# EAGLE board Xbee_Adapter (EAGLE 7.6.0)
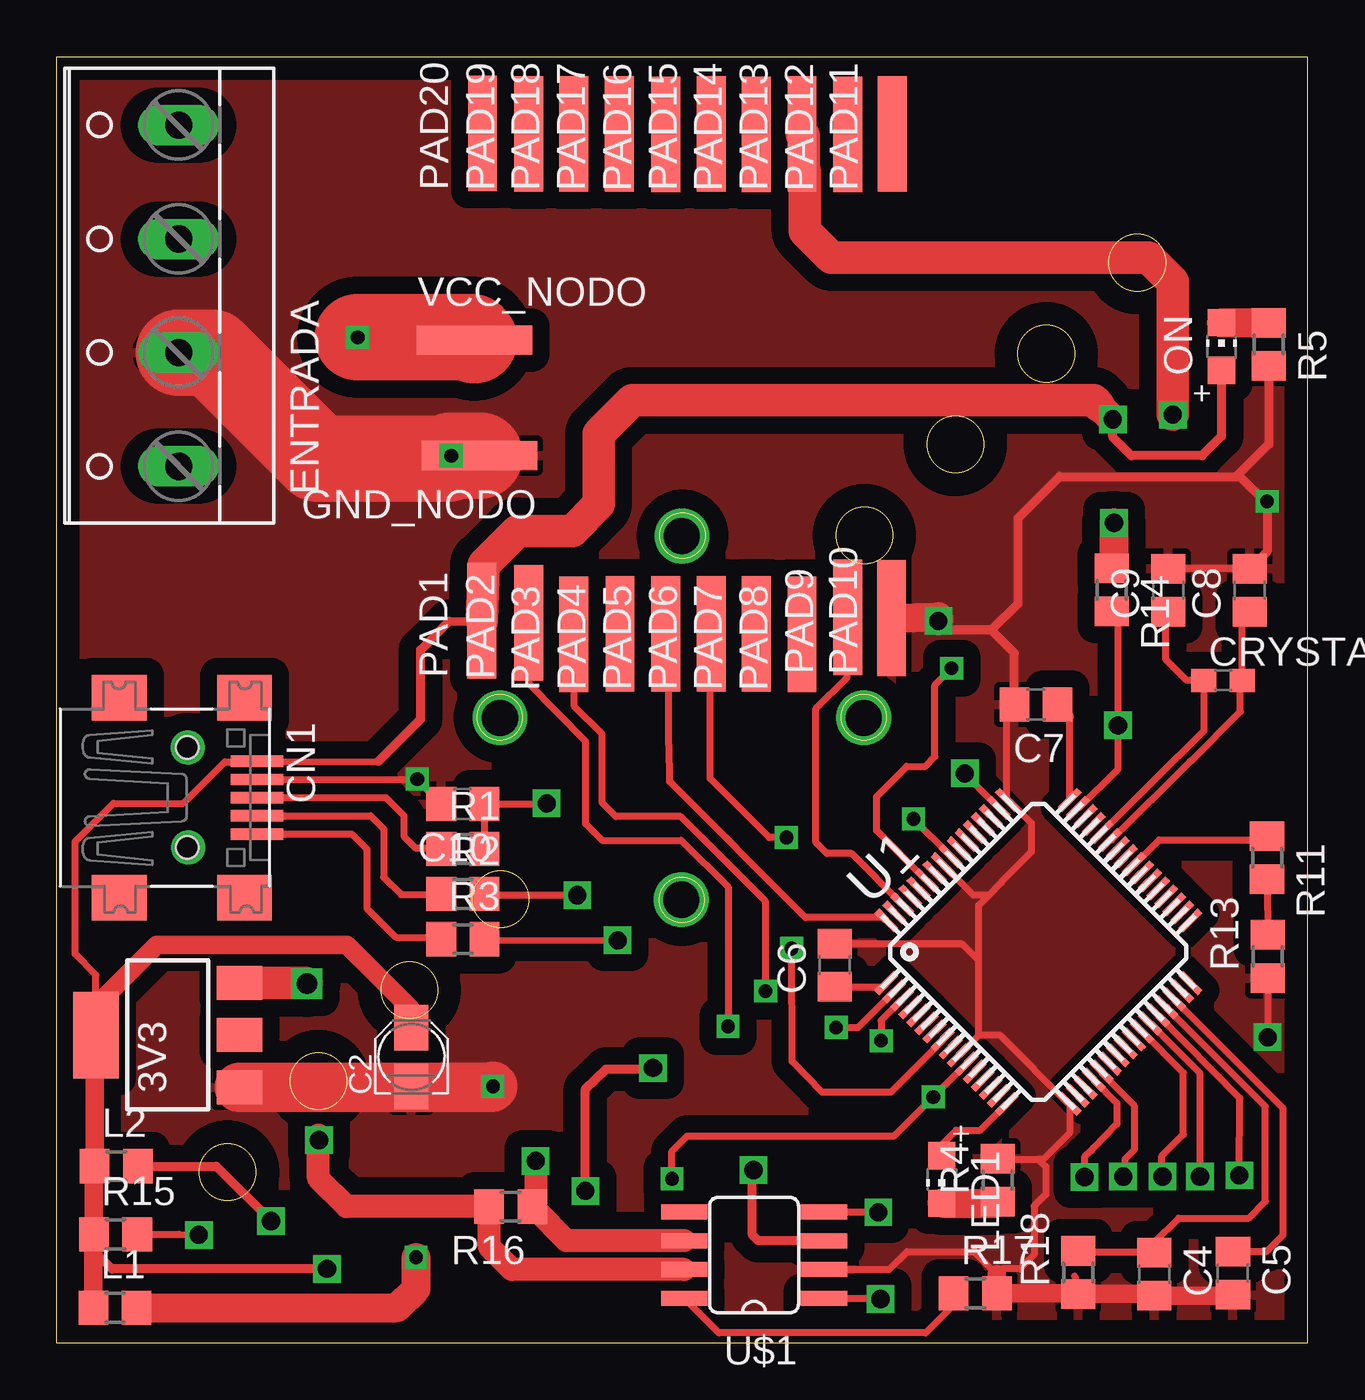
[diagram p0: board, top side]
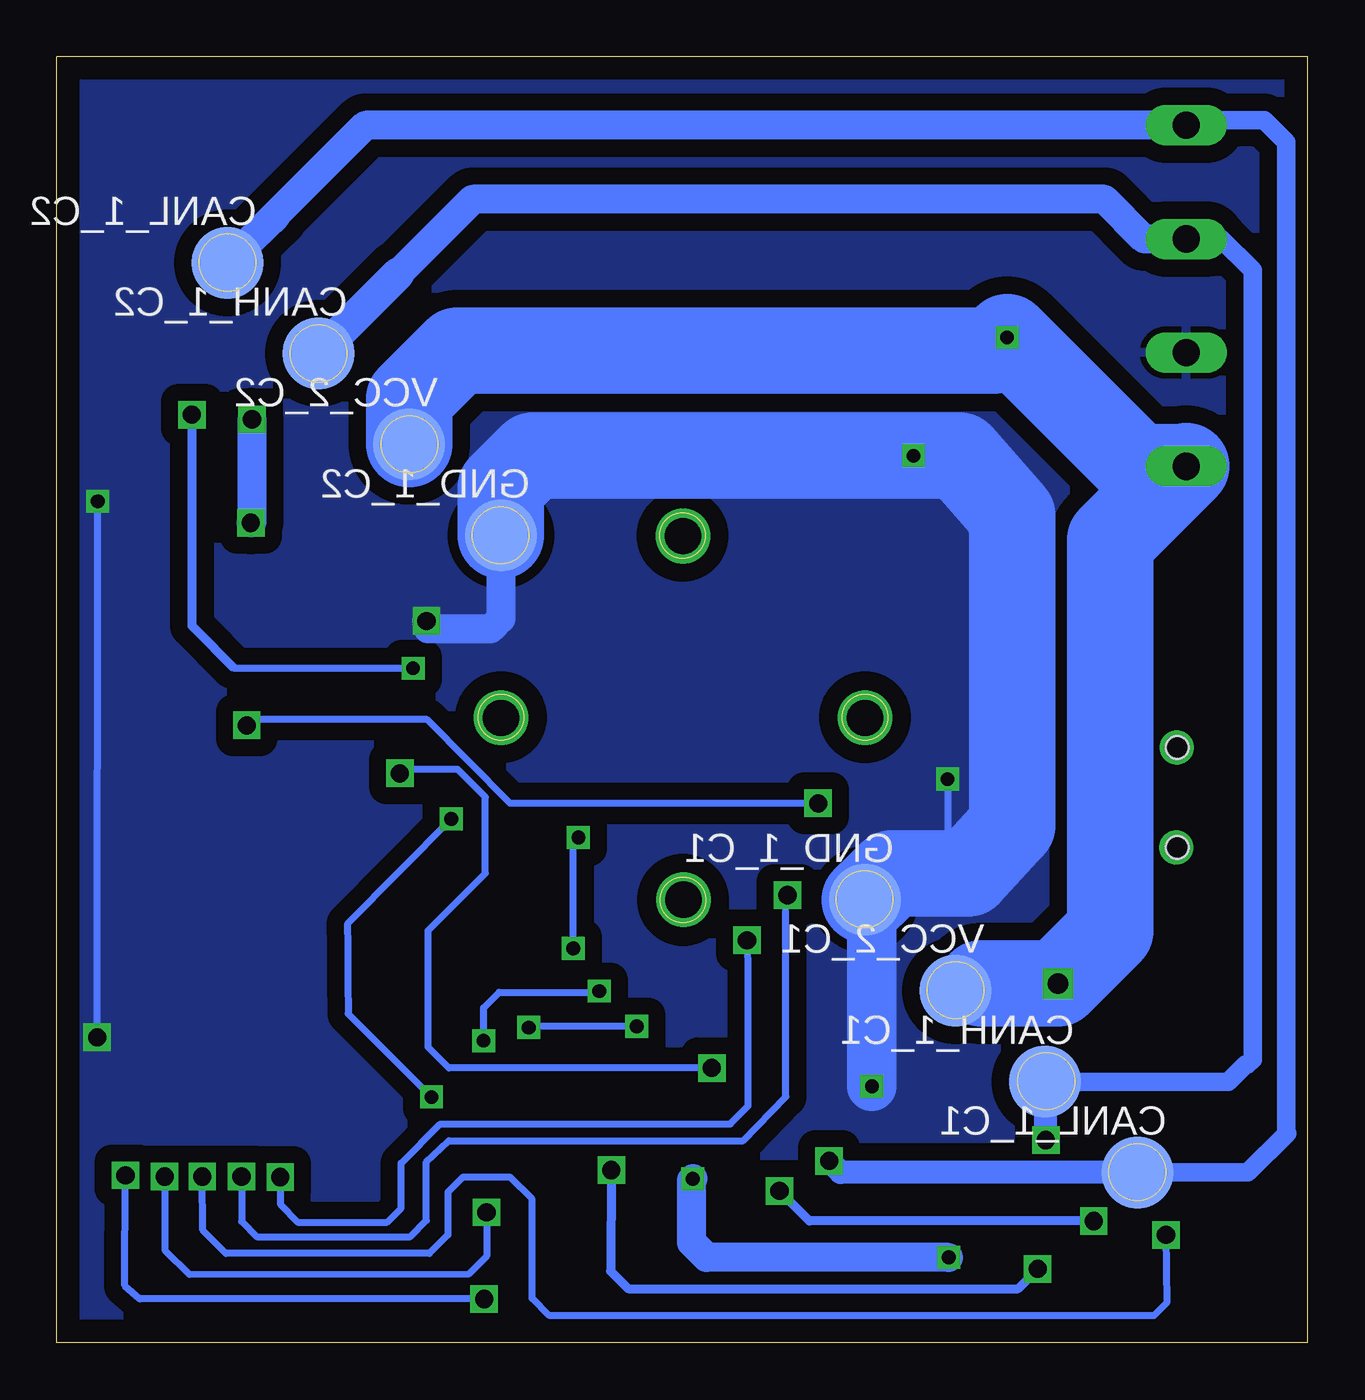
[diagram p1: board, bottom side, seen from below]

Size 55 x 56.55 mm. Coordinates in mm from the lower left corner, seen from the top.
Outline: 0,0 0,56.55 55,56.55 55,0 0,0
Outline: circle at 27.47,19.47 radius 1
Outline: circle at 19.47,27.5 radius 1
Outline: circle at 35.47,27.5 radius 1
Outline: circle at 43.5,43.5 radius 1.25
Outline: circle at 47.5,47.5 radius 1.25
Outline: circle at 43.5,43.5 radius 1.25
Outline: circle at 39.5,39.5 radius 1.25
Outline: circle at 35.5,35.5 radius 1.25
Outline: circle at 15.5,15.5 radius 1.25
Outline: circle at 11.5,11.5 radius 1.25
Outline: circle at 47.5,47.5 radius 1.25
Outline: circle at 39.5,39.5 radius 1.25
Outline: circle at 19.5,19.5 radius 1.25
Outline: circle at 7.5,7.5 radius 1.25
Outline: circle at 19.5,19.5 radius 1.25
Outline: circle at 15.5,15.5 radius 1.25
Outline: circle at 11.5,11.5 radius 1.25
Outline: circle at 35.5,35.5 radius 1.25
Outline: circle at 27.5,35.5 radius 1
Outline: circle at 7.5,7.5 radius 1.25
Copper layers (1*16): Top 0.035mm / dielectric 1.5mm / Bottom 0.035mm
Design rules "default": minimum track width 10mil, minimum drill 24mil, track to track 8mil, track to pad 8mil, pad to pad 8mil, via to via 8mil, smd to smd 8mil, copper to edge 40mil, drill to drill 8mil, minimum pad ring 10mil, minimum via ring 8mil, stop-mask expansion 4mil, vias tented up to drill 0mil, thermal gap 10mil

## Footprints (pad centres in the part's own frame; a part is rotated, then mirrored left to right if it is on the bottom)
SOT223 = smd 1.5 x 2: 1 -2.3,-3.15; 2 0,-3.15; 3 2.3,-3.15 | smd 3.8 x 2: 4 0,3.15
PANASONIC_A = smd 2 x 1.5: + 1.3,0; - -1.3,0
C0805 = smd 1.3 x 1.5: 1 -0.95,0; 2 0.95,0
B2,54 = smd 3.175 x 3.175 bottom: P$1 0,0 | smd 2.54 x 2.54 bottom: TP 0,0
USB-MINIB = smd 0.5 x 2.308: D+ 0,4.064; D- -0.8,4.064; GND 1.6,4.064; ID 0.8,4.064; VBUS -1.6,4.064 | smd 2 x 2.4: GND1 -4.4,-2; GND2 -4.4,3.5; GND3 4.4,3.5; GND4 4.4,-2 | hole 1: -2.2,1; 2.2,1
C0603 = smd 1.1 x 1: 1 -0.85,0; 2 0.85,0
W237-4 = drill 1.194 long: 1 -7.5,-1.27; 2 -2.5,-1.27; 3 2.5,-1.27; 4 7.5,-1.27
SMD2,54-5,08 = smd 1.27 x 5.08: 1 0,0
R0805 = smd 1.3 x 1.5: 1 -0.95,0; 2 0.95,0
CHIP-LED0805 = smd 1.2 x 1.2: A 0,-1.05; C 0,1.05
TQFP64-10X10 = smd 1.2 x 0.3: 1 -5.7,3.75; 2 -5.7,3.25; 3 -5.7,2.75; 4 -5.7,2.25; 5 -5.7,1.75; 6 -5.7,1.25; 7 -5.7,0.75; 8 -5.7,0.25; 9 -5.7,-0.25; 10 -5.7,-0.75; 11 -5.7,-1.25; 12 -5.7,-1.75; 13 -5.7,-2.25; 14 -5.7,-2.75; 15 -5.7,-3.25; 16 -5.7,-3.75; 33 5.7,-3.75; 34 5.7,-3.25; 35 5.7,-2.75; 36 5.7,-2.25; 37 5.7,-1.75; 38 5.7,-1.25; 39 5.7,-0.75; 40 5.7,-0.25; 41 5.7,0.25; 42 5.7,0.75; 43 5.7,1.25; 44 5.7,1.75; 45 5.7,2.25; 46 5.7,2.75; 47 5.7,3.25; 48 5.7,3.75 | smd 0.3 x 1.2: 17 -3.75,-5.7; 18 -3.25,-5.7; 19 -2.75,-5.7; 20 -2.25,-5.7; 21 -1.75,-5.7; 22 -1.25,-5.7; 23 -0.75,-5.7; 24 -0.25,-5.7; 25 0.25,-5.7; 26 0.75,-5.7; 27 1.25,-5.7; 28 1.75,-5.7; 29 2.25,-5.7; 30 2.75,-5.7; 31 3.25,-5.7; 32 3.75,-5.7; 49 3.75,5.7; 50 3.25,5.7; 51 2.75,5.7; 52 2.25,5.7; 53 1.75,5.7; 54 1.25,5.7; 55 0.75,5.7; 56 0.25,5.7; 57 -0.25,5.7; 58 -0.75,5.7; 59 -1.25,5.7; 60 -1.75,5.7; 61 -2.25,5.7; 62 -2.75,5.7; 63 -3.25,5.7; 64 -3.75,5.7
SO8 = smd 0.66 x 2.032: 1 -1.905,-3.073; 2 -0.635,-3.073; 3 0.635,-3.073; 4 1.905,-3.073; 5 1.905,3.073; 6 0.635,3.073; 7 -0.635,3.073; 8 -1.905,3.073

## Placement (x,y rotation side)
3V3  LD117AS33TR  [SOT223]  4.87,13.53 90 top
C2  [PANASONIC_A]  15.59,12.56 90 top
C4  2200pF  [C0805]  48.25,3.01 270 top
C5  10nF  [C0805]  51.71,3.07 270 top
C6  1u  [C0805]  34.21,16.6 90 top
C7  1u  [C0805]  43.04,28.06 180 top
C8  36pF  [C0805]  52.44,33.09 90 top
C9  18pF  [C0805]  48.86,33.09 90 top
C10  0.1u  [C0805]  17.85,23.69 180 top
CANH_1_C1  TPB2,54  [B2,54]  11.55,11.47 0 top
CANH_1_C2  TPB2,54  [B2,54]  43.5,43.5 0 top
CANL_1_C1  TPB2,54  [B2,54]  7.48,7.48 0 top
CANL_1_C2  TPB2,54  [B2,54]  47.49,47.49 0 top
CN1  [USB-MINIB]  4.74,23.97 270 top
CRYSTAL  32.768kHz  [C0603]  51.27,29.13 0 top
ENTRADA  [W237-4]  4.08,46.04 90 top
GND_1_C1  TPB2,54  [B2,54]  19.47,19.47 0 top
GND_1_C2  TPB2,54  [B2,54]  35.48,35.5 0 top
GND_NODO  [SMD2,54-5,08]  18.58,39.01 90 top
L1  330-600Ohm@1Mhz  [R0805]  2.56,1.54 0 top
L2  330-600Ohm@1Mhz  [R0805]  2.61,7.76 0 top
LED1  [CHIP-LED0805]  38.9,7.18 180 top
ON  [CHIP-LED0805]  51.2,43.81 0 top
PAD1  [SMD2,54-5,08]  18.69,31.74 0 top
PAD2  [SMD2,54-5,08]  20.74,31.67 0 top
PAD3  [SMD2,54-5,08]  22.72,31.16 0 top
PAD4  [SMD2,54-5,08]  24.76,31.18 0 top
PAD5  [SMD2,54-5,08]  26.76,31.18 0 top
PAD6  [SMD2,54-5,08]  28.77,31.18 0 top
PAD7  [SMD2,54-5,08]  30.75,31.18 0 top
PAD8  [SMD2,54-5,08]  32.76,31.16 0 top
PAD9  [SMD2,54-5,08]  34.76,31.89 0 top
PAD10  [SMD2,54-5,08]  36.69,31.87 0 top
PAD11  [SMD2,54-5,08]  36.72,53.15 0 top
PAD12  [SMD2,54-5,08]  34.76,53.13 0 top
PAD13  [SMD2,54-5,08]  32.76,53.15 0 top
PAD14  [SMD2,54-5,08]  30.75,53.13 0 top
PAD15  [SMD2,54-5,08]  28.77,53.15 0 top
PAD16  [SMD2,54-5,08]  26.76,53.13 0 top
PAD17  [SMD2,54-5,08]  24.73,53.15 0 top
PAD18  [SMD2,54-5,08]  22.72,53.15 0 top
PAD19  [SMD2,54-5,08]  20.74,53.15 0 top
PAD20  [SMD2,54-5,08]  18.71,53.18 0 top
R1  0  [R0805]  17.85,21.71 0 top
R2  0  [R0805]  17.85,19.73 0 top
R3  0  [R0805]  17.85,17.75 0 top
R4  [R0805]  41.37,7.15 90 top
R5  1K  [R0805]  53.28,43.91 270 top
R11  0  [R0805]  53.2,21.33 270 top
R13  0  [R0805]  53.23,16.98 90 top
R14  4.7k  [R0805]  46.37,33.11 270 top
R15  0  [R0805]  2.58,4.77 0 top
R16  120  [R0805]  19.96,5.99 180 top
R17  10k  [R0805]  40.38,2.18 0 top
R18  0  [R0805]  44.9,3.09 90 top
U1  CY8C4247AZI-M485  [TQFP64-10X10]  43.15,17.19 45 top
U$1  SN65HVD230/1  [SO8]  30.65,3.85 90 top
VCC_2_C1  TPB2,54  [B2,54]  15.49,15.49 0 top
VCC_2_C2  TPB2,54  [B2,54]  39.51,39.51 0 top
VCC_NODO  [SMD2,54-5,08]  18.36,44.09 270 top

## Library data of the parts
3V3 = v-reg
C2 C4-C10 CRYSTAL L1 L2 R1-R5 R11 R13-R18 = rcl
CANH_1_C1 CANH_1_C2 CANL_1_C1 CANL_1_C2 GND_1_C1 GND_1_C2 VCC_2_C1 VCC_2_C2 = testpad
CN1 LED1 ON = adafruit
ENTRADA = con-wago-500; OC_FARNELL: unknown; OC_NEWARK: unknown
GND_NODO PAD1-PAD20 VCC_NODO = wirepad
U1 = CypressPSoC
U$1 = texas_instruments

## Nets
3V3: 3V3.4 C2.+ CN1.VBUS L1.1 L2.1 ON.A PAD1.1 R14.1 R15.1 U$1.3
CAN_RX: U1.27 U$1.4
CAN_TX: U1.28 U$1.1
CANH: CANH_1_C1.TP CANH_1_C2.TP ENTRADA.3 R16.2 U$1.7
CANL: CANL_1_C1.TP CANL_1_C2.TP ENTRADA.4 R16.1 U$1.6
CMOD: C4.1 R18.2 U1.29
CTANK: C5.1 U1.30
GND: 3V3.1 C2.- C4.2 C5.2 C6.2 C7.2 C8.2 C9.2 C10.2 CN1.D- ENTRADA.2 GND_1_C1.TP GND_1_C2.TP GND_NODO.1 PAD10.1 R4.2 R5.2 R13.1 R17.2 R18.1 U1.10 U1.17 U1.49 U1.57 U$1.2
N$1: CN1.D+ R1.1
N$2: CN1.ID R2.1
N$3: CN1.GND R3.1
N$4: R11.2 R13.2
N$5: LED1.A U1.16
N$6: LED1.C R4.1
N$9: R17.1 U$1.8
N$10: ON.C R5.1
P0_1: R11.1 U1.40
P0_4: C8.1 CRYSTAL.2 U1.43
P0_5: C9.1 CRYSTAL.1 U1.44
RESET_XBEE: PAD5.1 U1.64
RX_STRENGTH: PAD6.1 U1.8
SAR_BY: C6.1 U1.1
SCL_S2: U1.51
SCL_S3: U1.12
SDA_S2: U1.52
SDA_S3: U1.13
SLEEP_CTRL: PAD9.1 U1.62
SLEEP_XBEE: PAD13.1 U1.59
SWDCLK: R2.2 U1.21
SWDIO: R3.2 U1.20
UART_RX: PAD3.1 U1.3
UART_TX: PAD2.1 U1.2
VCC_9-12V: 3V3.3 ENTRADA.1 VCC_2_C1.TP VCC_2_C2.TP VCC_NODO.1
VCCD: C7.1 U1.48
VDDA: L1.2 U1.11 U1.56
VDDD: L2.2 U1.50
VDDIO: R15.2 U1.26
XRES: C10.1 R1.2 R14.2 U1.47

## Tracks (layer width: path | path; a pad name or v marks a point on that pad's centre or on a via)
3V3  (via drill 0.8)
  Top 0.305: 3V3.4 1.72,14.8 1.72,16.17 0.8,17.09 0.8,22.04 2.48,23.72 5.55,23.72 7.38,25.54 8.78,25.54 CN1.VBUS 14.06,25.54 15.99,27.45
  Top 0.406: U$1.3 30.83,4.49 30.57,4.74 30.57,7.71 v30.62,7.59 | v11.88,3.24 2.42,3.24 1.61,4.06 | PAD1.1 17.24,31.72 15.99,30.47 15.99,27.45 15.99,27.42 14.14,25.57 | ON.A 51.2,39.87 50.33,39.01 47.24,39.01 46.42,39.82 v46.42,40.61
  Top 0.813: L1.1 1.61,4.06 1.61,4.74 R15.1 1.63,7.74 L2.1 1.66,13.47 3V3.4 | C2.+ 15.59,14.65 12.74,17.49 4.39,17.49 1.72,14.8
  Top 1.27: 45.81,41.22 v46.42,40.61 | v46.47,36.06 46.47,34.16 R14.1
  Top 1.422: PAD1.1 18.76,34.23 20.24,35.7 22.65,35.7 23.82,36.87 23.82,39.97 25.29,41.44 45.58,41.44 45.81,41.22
  Bottom 0.406: v30.62,7.59 30.65,3.14 29.89,2.38 12.74,2.38 v11.88,3.24
  Bottom 1.27: v46.42,40.61 46.42,36.11 v46.47,36.06
CAN_RX  (via drill 0.8)
  Top 0.305: U$1.4 36.09,5.76 v36.11,5.73 | v50.26,7.31 50.26,11.84 U1.27
  Bottom 0.305: v36.11,5.73 36.11,3.8 36.9,3.01 49.17,2.99 50.23,4.03 50.23,7.28 v50.26,7.31
CAN_TX  (via drill 0.8)
  Top 0.305: U$1.1 36.19,1.95 v36.21,1.92 | v51.99,7.36 52.01,10.75 U1.28
  Bottom 0.305: v36.21,1.92 51.35,1.92 52.01,2.51 v51.99,7.36
CANH  (via drill 0.8)
  Top 1.016: U$1.7 20.01,3.22 19.02,4.21 19.02,5.98 R16.2 12.74,5.99 11.5,7.23 11.5,9.14 v11.52,8.91
  Bottom 0.813: CANH_1_C1.TP 3.5,11.47 2.73,12.23 2.63,12.23 2.43,12.44 2.43,47.16 3.85,48.58 5.31,48.58
  Bottom 1.016: v11.52,8.91 11.52,11.45 CANH_1_C1.TP
  Bottom 1.27: 42.89,44.11 CANH_1_C2.TP | 5.31,48.58 ENTRADA.3 7.19,48.54 8.93,50.28 36.72,50.28 40.75,46.26
  Bottom 1.422: 40,47.01 40.75,46.26 42.89,44.11
CANL  (via drill 0.8)
  Top 1.016: U$1.6 22.4,4.49 21.05,5.84 | 21.05,5.84 R16.1 | v21.05,7.99 21.05,5.84
  Bottom 0.813: CANL_1_C1.TP 2.63,7.48 0.91,9.21 0.96,9.21 0.96,52.8 1.92,53.76 5.13,53.76
  Bottom 1.016: CANL_1_C1.TP 20.54,7.48 v21.05,7.99
  Bottom 1.27: 45.36,49.55 CANL_1_C2.TP 41.44,53.54 ENTRADA.4 5.13,53.76
CMOD
  Top 0.305: R18.2 44.98,3.96 C4.1 48.25,4.41 49.32,5.48 52.39,5.48 53.13,6.21 53.13,10.39 U1.29 48.81,14.75
CTANK
  Top 0.305: C5.1 53.19,4.02 53.92,4.74 53.92,10.31 U1.30
GND  (via drill 0.6, 0.8)
  Top 0.305: 44.75,2.93 R18.1 | U$1.2 36.59,3.22 37.38,4 40.34,4 41.33,3.01 41.56,3.24 42.33,3.24 42.97,3.88 42.97,6.01 43.48,6.52 43.48,7.74 43.15,8.07 | CN1.D- 15.82,24.77 C10.2 16.9,23.73 v15.84,24.78 | C9.2 C8.2 53.26,34.85 | R13.1 v53.23,13.43 | 38.78,31.44 v38.75,31.74 | 40.52,13.5 41.47,13.5 44.47,10.51 U1.17 44.53,9.22 43.37,8.07 43.15,8.07 | 40.52,13.5 U1.10 | 41.77,27.73 U1.49 41.82,23.87 42.84,22.85 42.84,21.58 41.52,20.26 41.52,20.24 40.96,19.68 | 40.96,19.68 40.3,19.68 U1.57 | 40.52,13.5 40.52,16.81 | 40.52,16.81 40.52,19.24 40.96,19.68 | C6.2 39.78,17.55 40.52,16.81 | R4.2 41.4,8.07 43.15,8.07 | C2.- 7.9,11.26 7.87,11.29 7.97,11.29 8.07,11.19
  Top 0.406: 41.09,31.34 42.09,30.33 C7.2 41.77,27.73 | 41.09,31.34 38.83,31.34 v38.75,31.74 | 41.09,31.34 42.26,32.5 42.26,36.26 44.09,38.09 51.86,38.09 | 51.86,38.09 52.01,38.09 53.2,36.9 53.2,34.8 C8.2 53.2,34.8 v53.2,37 | R5.2 53.28,39.51 51.86,38.09
  Top 0.813: 41.33,3.01 R17.2 44.86,2.18 R18.1 48.18,2.14 C4.2 51.6,2.06 C5.2
  Top 1.27: PAD10.1 38.75,31.92 v38.75,31.74
  Top 2.184: 3V3.1 19.13,11.23 v19.17,11.27
  Top 3.81: GND_NODO.1 v17.34,39.01 17.21,38.88 11.47,38.88 6.81,43.54 ENTRADA.2
  Bottom 0.305: v53.23,13.43 v53.2,37 | v15.84,24.78 15.84,21.4 15.08,20.64
  Bottom 1.27: GND_1_C2.TP 35.48,31.84 35.93,31.39 38.68,31.39 v38.75,31.74
  Bottom 2.184: v19.17,11.27 19.17,19.78 18.97,19.98
  Bottom 3.81: 13.1,36.21 13,36.36 | 13,36.36 13,22.75 14.93,20.64 15.08,20.64 18.31,20.64 18.97,19.98 GND_1_C1.TP | GND_1_C2.TP 35.48,37.61 34.08,39.01 v17.34,39.01 15.31,39.01 13,36.36
  pour Bottom (isolate 0.762): -0.21,56.51 -0.24,24.4 -0.62,10.23 -0.59,10.33 -0.59,-0.24 54.65,-0.34 54.86,56.38 3.34,56.48
  pour Top (isolate 0.762): -0.74,56.53 -0.21,24.48 -0.36,24.53 -0.59,10.2 -0.62,10.23 -0.54,-0.36 54.65,-0.29 54.7,56.46
N$1
  Top 0.305: CN1.D+ 14.47,23.97 15.26,23.18 15.26,22.27 15.77,21.76 16.85,21.76 R1.1
N$2
  Top 0.305: CN1.ID 13.8,23.17 14.37,22.6 14.37,20.46 15.13,19.7 16.87,19.7 R2.1
N$3
  Top 0.305: CN1.GND 12.97,22.37 13.63,21.71 13.63,19.09 14.9,17.82 16.82,17.82 R3.1
N$4
  Top 0.305: R11.2 53.2,20.12 R13.2
N$5
  Top 0.305: LED1.A 38.9,8.7 39.54,9.34 40.6,9.34 U1.16
N$6
  Top 1.27: LED1.C 41.29,6.13 R4.1
N$7  (via drill 1)
  other vias: 5.76,26.18
N$8  (via drill 1)
  other vias: 5.78,21.79
N$9
  Top 0.305: R17.1 39.43,1.66 38.19,0.42 29.1,0.42 U$1.8
N$10
  Top 1.27: ON.C R5.1
N$23  (via drill 1.6)
  other vias: 35.48,27.47
N$24  (via drill 1.6)
  other vias: 27.47,35.48
N$25  (via drill 1.6)
  other vias: 19.47,27.47
N$28  (via drill 1.6)
  other vias: 27.45,19.47
P0_1
  Top 0.305: U1.40 47.38,21.04 48.45,22.12 53.04,22.12 R11.1
P0_4
  Top 0.305: C8.1 52.12,31.82 CRYSTAL.2 52.04,29.04 52.04,27.75 49.85,25.57 49.83,25.57 46.36,22.1 U1.43
P0_5
  Top 0.305: C9.1 48.76,32.04 48.76,30.04 49.67,29.13 CRYSTAL.1 50.44,29.11 50.44,26.92 49.32,25.8 49.29,25.8 45.95,22.46 U1.44
RESET_XBEE
  Top 0.305: U1.64 36.28,18.69 32.9,18.69 26.94,24.68 26.92,26.28 26.89,26.31 26.89,31.06 PAD5.1
RX_STRENGTH  (via drill 0.6)
  Top 0.305: U1.8 38.94,13.29 36.67,11.02 33.65,11.02 32.33,12.36 v32.3,17.34 | v32.07,22.22 31.31,22.22 28.72,24.81 28.72,31.13 PAD6.1
  Bottom 0.305: v32.3,17.34 32.3,21.99 v32.07,22.22
SAR_BY
  Top 0.305: C6.1 36.31,15.65 U1.1
SLEEP_CTRL
  Top 0.305: U1.62 34.94,21.51 33.85,21.51 33.37,21.99 33.37,27.88 34.74,29.25 34.74,31.39 PAD9.1
SLEEP_XBEE  (via drill 0.6, 0.8)
  Top 0.305: U1.59 38.22,20.33 36.03,22.52 36.03,24.02 37.36,25.34 38.17,25.34 38.6,25.77 38.6,28.92 v39.34,29.66
  Top 1.422: v49.06,40.81 49.06,46.65 48,47.72 34.05,47.72 32.88,48.89 32.88,51.53 32.83,51.58 32.83,53.08 PAD13.1
  Bottom 0.305: v39.34,29.66 47.21,29.66 47.29,29.74
  Bottom 0.406: v49.06,40.81 49.06,31.54 48.07,30.55 48.07,30.52 47.29,29.74
SWDCLK  (via drill 0.8)
  Top 0.305: U1.21 45.94,11.85 47.36,10.43 47.36,8.48 46.96,8.07 46.96,7.48 v46.88,7.31 | v22.88,19.68 18.85,19.68 R2.2
  Bottom 0.305: v46.88,7.31 46.88,5.33 46.22,4.67 39.46,4.67 38.75,5.38 38.75,7.94 37.76,8.88 24.83,8.88 22.95,10.81 22.95,19.22 v22.88,19.68
SWDIO  (via drill 0.8)
  Top 0.305: U1.20 45.59,11.55 46.6,10.53 46.6,9.62 45.56,8.55 45.48,8.45 45.18,8.17 v45.18,7.28 | v24.66,17.7 18.87,17.67 R3.2
  Bottom 0.305: v45.18,7.28 45.18,6.09 44.42,5.3 40.48,5.3 39.87,5.91 39.87,7.89 38.14,9.62 25.39,9.62 24.6,10.41 24.6,16.68 v24.66,17.7
UART_RX  (via drill 0.6)
  Top 0.305: U1.3 36.24,14.16 v36.24,13.28 | v31.16,15.46 31.16,19.4 27.42,23.13 24.58,23.13 23.97,23.74 23.97,26.76 22.75,27.98 22.75,31.13 PAD3.1
  Bottom 0.305: v36.24,13.28 36.24,14.72 35.55,15.41 31.21,15.41 v31.16,15.46
UART_TX  (via drill 0.6)
  Top 0.305: PAD2.1 20.74,29 23.23,26.46 23.23,22.83 23.97,22.09 27.45,22.09 29.51,20.03 v29.51,13.91 | v34.26,13.86 35.22,13.86 U1.2
  Bottom 0.305: v29.51,13.91 34.31,13.91 v34.26,13.86
VCC_9-12V  (via drill 0.6, 0.9)
  Top 1.422: 3V3.3 10.95,15.83 v10.99,15.79
  Top 3.81: v13.23,44.21 18.23,44.21 VCC_NODO.1
  Bottom 1.422: 14.37,15.79 15.23,14.93 15.23,15.23 VCC_2_C1.TP
  Bottom 3.81: 8.68,35.21 8.68,18.1 v10.99,15.79 14.37,15.79 | 8.68,35.21 ENTRADA.1 | 8.68,35.21 8.68,35.32 5.5,38.5 7.51,38.5 v13.23,44.21 13.81,43.63 37.41,43.63 39.51,41.52 VCC_2_C2.TP
VCCD
  Top 0.305: U1.48 44.53,27.53
  Top 0.406: 44.53,27.53 C7.1
VDDA  (via drill 0.6)
  Top 0.305: v27.04,7.21 27.04,8.42 27.7,9.08 36.81,9.08 v38.53,10.8 U1.11 | U1.56 v37.66,23.03
  Top 1.27: L1.2 14.95,1.54 15.79,2.38 v15.79,3.75
  Bottom 0.305: v37.66,23.03 42.23,18.41 42.21,17.44 42.21,15.92 42.2,14.47 v38.53,10.8
  Bottom 1.27: v15.79,3.75 26.43,3.75 27.09,4.41 27.09,7.15 v27.04,7.21
VDDD  (via drill 0.8)
  Top 0.305: 39.92,25.01 U1.50
  Top 0.406: L2.2 7,7.76 v9.42,5.35 | v23.23,6.67 23.23,11.17 24.15,12.03 26.15,12.03 v26.2,12.08 | v39.92,25.04 39.92,25.01
  Bottom 0.305: v26.2,12.08 37.76,12.08 38.68,13 38.68,18.13 36.16,20.64 36.16,23.99 37.38,25.21 39.74,25.21 v39.92,25.04
  Bottom 0.406: v9.42,5.35 21.91,5.35 v23.23,6.67
VDDIO  (via drill 0.8)
  Top 0.305: R15.2 5.38,4.77 v6.24,4.74 | v48.61,7.31 48.58,8.22 49.52,9.16 49.52,11.87 U1.26
  Bottom 0.305: v48.61,7.31 48.58,4.94 47.57,3.93 38.63,3.93 37.81,4.74 37.81,6.62 37.15,7.28 35.07,7.28 34.1,6.32 34.1,1.95 33.34,1.19 6.77,1.19 6.21,1.74 v6.24,4.74
XRES  (via drill 0.8)
  Top 0.305: R1.2 C10.1 21.58,23.69 v21.53,23.72 | R14.2 46.65,31.88 v46.65,27.14 46.65,25.24 44.93,23.52 U1.47
  Bottom 0.305: v21.53,23.72 35.07,23.72 38.73,27.4 46.4,27.4 v46.65,27.14